# EAGLE board Centerboard - Prototype 2_WIP (EAGLE 7.2.0)
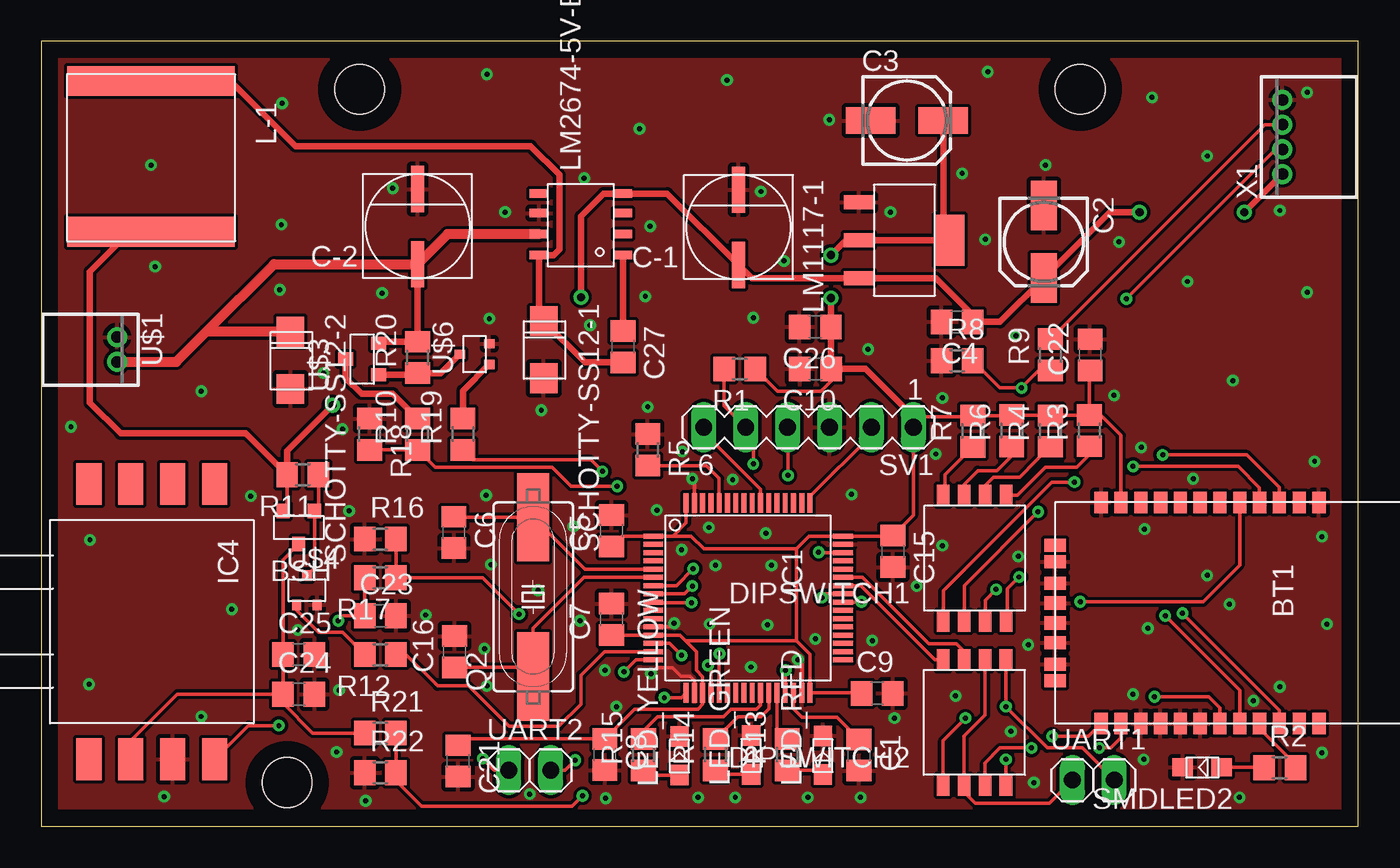
[diagram p0: board, top side]
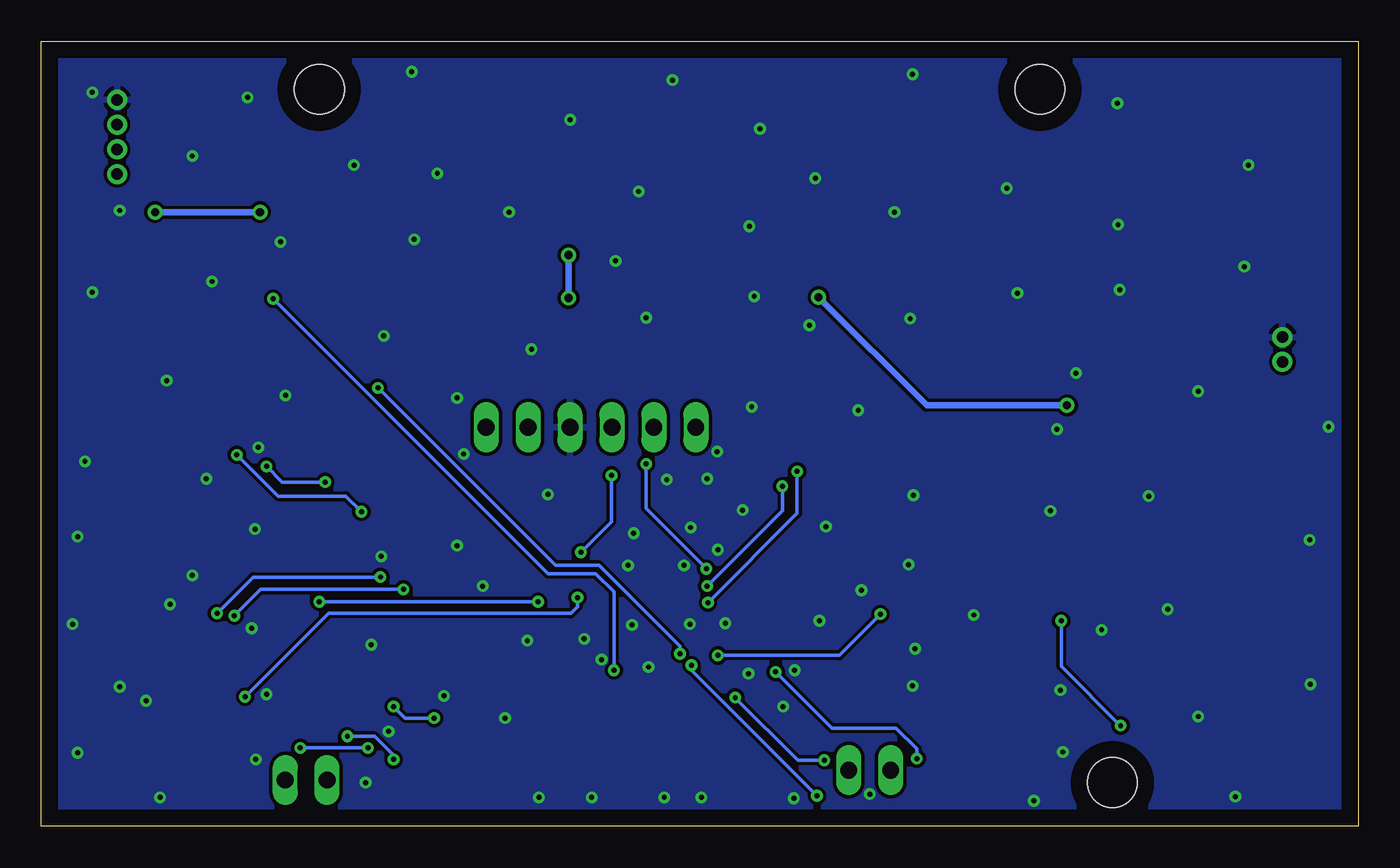
[diagram p1: board, bottom side, seen from below]

Size 79.8 x 47.55 mm. Coordinates in mm from the lower left corner, seen from the top.
Outline: 0,0 79.8,0 79.8,47.55 0,47.55 0,0
Copper layers (1*16): Top 0.035mm / dielectric 1.5mm / Bottom 0.035mm
Design rules "default *": minimum track width 0.2mm, minimum drill 0.3mm, track to track 0.2mm, track to pad 0.2mm, pad to pad 0.2mm, via to via 0.2mm, smd to smd 0mil, copper to edge 40mil, drill to drill 8mil, minimum pad ring 10mil, minimum via ring 8mil, stop-mask expansion 4mil, vias tented up to drill 0mil, thermal gap 10mil
Holes 3 mm at 19.3,44.65 14.9,2.65 62.95,44.65

## Footprints (pad centres in the part's own frame; a part is rotated, then mirrored left to right if it is on the bottom)
P-CHANNEL = smd 0.8 x 0.9: DRAIN 0,1; GATE -0.95,-1; SOURCE 0.95,-1
RN42 = smd 1.3 x 0.8: 1 -6.7,3.2; 2 -6.7,2; 3 -6.7,0.8; 4 -6.7,-0.4; 5 -6.7,-1.6; 6 -6.7,-2.8; 7 -6.7,-4; 8 -6.7,-5.2; 9 -6.7,-6.4; 10 -6.7,-7.6; 11 -6.7,-8.8; 12 -6.7,-10; 13 6.7,-10; 14 6.7,-8.8; 15 6.7,-7.6; 16 6.7,-6.4; 17 6.7,-5.2; 18 6.7,-4; 19 6.7,-2.8; 20 6.7,-1.6; 21 6.7,-0.4; 22 6.7,0.8; 23 6.7,2; 24 6.7,3.2 | smd 0.8 x 1.3: 28 3.1,-12.8; 29 -3.1,-12.8; 30 4.1,-12.8; 31 1.8,-12.8; 32 0.6,-12.8; 33 -0.6,-12.8; 34 -1.8,-12.8; 35 -4.1,-12.8
C0805 = smd 1.3 x 1.5: 1 -0.95,0; 2 0.95,0
153CLV-0505 = smd 3 x 1.6: + 2.2,0; - -2.2,0
CAP-6.3MM-DIA = smd 0.8 x 2.8: + 0,2.3; - 0,-2.25
DIPSWITCH4P = smd 0.76 x 1.27: B1 0,0; B2 1.27,0; B3 2.54,0; B4 3.81,0; T1 0,7.62; T2 1.27,7.62; T3 2.54,7.62; T4 3.81,7.62
LQFP64 = smd 0.3 x 1.2: 1 -3.75,-5.75; 2 -3.25,-5.75; 3 -2.75,-5.75; 4 -2.25,-5.75; 5 -1.75,-5.75; 6 -1.25,-5.75; 7 -0.75,-5.75; 8 -0.25,-5.75; 9 0.25,-5.75; 10 0.75,-5.75; 11 1.25,-5.75; 12 1.75,-5.75; 13 2.25,-5.75; 14 2.75,-5.75; 15 3.25,-5.75; 16 3.75,-5.75; 33 3.75,5.75; 34 3.25,5.75; 35 2.75,5.75; 36 2.25,5.75; 37 1.75,5.75; 38 1.25,5.75; 39 0.75,5.75; 40 0.25,5.75; 41 -0.25,5.75; 42 -0.75,5.75; 43 -1.25,5.75; 44 -1.75,5.75; 45 -2.25,5.75; 46 -2.75,5.75; 47 -3.25,5.75; 48 -3.75,5.75 | smd 1.2 x 0.3: 17 5.75,-3.75; 18 5.75,-3.25; 19 5.75,-2.75; 20 5.75,-2.25; 21 5.75,-1.75; 22 5.75,-1.25; 23 5.75,-0.75; 24 5.75,-0.25; 25 5.75,0.25; 26 5.75,0.75; 27 5.75,1.25; 28 5.75,1.75; 29 5.75,2.25; 30 5.75,2.75; 31 5.75,3.25; 32 5.75,3.75; 49 -5.75,3.75; 50 -5.75,3.25; 51 -5.75,2.75; 52 -5.75,2.25; 53 -5.75,1.75; 54 -5.75,1.25; 55 -5.75,0.75; 56 -5.75,0.25; 57 -5.75,-0.25; 58 -5.75,-0.75; 59 -5.75,-1.25; 60 -5.75,-1.75; 61 -5.75,-2.25; 62 -5.75,-2.75; 63 -5.75,-3.25; 64 -5.75,-3.75
CASE1351-01 = smd 2.54 x 1.52: GND 8.335,1.27; NC1 8.335,-3.81; NC2 -8.335,3.81; NC3 -8.335,1.27; NC4 -8.335,-1.27; NC5 -8.335,-3.81; VOUT 8.335,3.81; VS 8.335,-1.27
INDUCTOR = smd 1.8 x 10.16: 1 0,0; 2 9.14,0
SMD_LED_CUSTOM = smd 1.25 x 1.1: 1 0,0; 2 2.35,0
LM1117 = smd 0.84 x 1.8: ADJ/GND 0,0; INPUT 4.6,0; OUTPUT 2.3,0 | smd 3.1 x 1.8: OUTPUT2 2.3,5.5
LM2674 = smd 0.51 x 1.1: 1 0,0; 2 1.27,0; 3 2.54,0; 4 3.72,0; 5 3.72,5.1; 6 2.54,5.1; 7 1.27,5.1; 8 0,5.1
HC49UP = smd 5.334 x 1.93: 1 -4.826,0; 2 4.826,0
R0805 = smd 1.3 x 1.5: 1 -0.95,0; 2 0.95,0
SCHOTTY = smd 1.8 x 1.68: + 3.46,0; - 0,0
MA06-1 = drill 1.016 long: 1 -6.35,0; 2 -3.81,0; 3 -1.27,0; 4 1.27,0; 5 3.81,0; 6 6.35,0
JST-2WAYS = drill 0.7 pad 1.1: 1 -0.98,2.54; 2 0.52,2.54
SOT-323 = smd 0.559 x 0.648: DRAIN 0,0.895; GATE -0.623,-0.895; SOURCE 0.623,-0.895
1X02 = drill 1.016 long: 1 -1.27,0; 2 1.27,0
S4B-ZR = drill 0.7 pad 1.1: 1 -2.25,0; 2 -0.75,0; 3 0.75,0; 4 2.25,0

## Placement (x,y rotation side)
BSH  BSH201  [P-CHANNEL]  15.6,18.1 180 top
BT1  BLUETOOTH-RN42  [RN42]  74.22,12.92 270 top
C1  4u7  [C0805]  49.55,4.32 270 top
C2  10u  [153CLV-0505]  60.75,35.4 270 top
C3  10u  [153CLV-0505]  52.45,42.75 0 top
C4  100n  [C0805]  55.5,30.55 180 top
C5  100n  [C0805]  34.55,17.9 90 top
C6  25p  [C0805]  25,17.8 270 top
C7  100n  [C0805]  34.55,12.54 90 top
C8  100n  [C0805]  34.15,4.35 270 top
C9  100n  [C0805]  50.65,8.05 0 top
C10  100n  [C0805]  46.91,27.7 180 top
C15  100n  [C0805]  51.6,16.65 270 top
C16  25p  [C0805]  25.05,10.57 90 top
C21  1u  [C0805]  25.25,3.96 270 top
C22  100n  [C0805]  63.55,28.55 90 top
C23  470pF  [C0805]  20.55,12.75 0 top
C24  1uF  [C0805]  15.6,8 0 top
C25  0.01uF  [C0805]  15.6,10.4 0 top
C26  100n  [C0805]  46.9,30.25 180 top
C27  0.01uF  [C0805]  35.25,29.05 270 top
C-1  100uF  [CAP-6.3MM-DIA]  42.25,36.3 180 top
C-2  100uF  [CAP-6.3MM-DIA]  22.8,36.35 180 top
DIPSWITCH1  DIPSWITCH_4P  [DIPSWITCH4P]  58.47,20.05 180 top
DIPSWITCH2  DIPSWITCH_4P  [DIPSWITCH4P]  58.45,10.1 180 top
IC1  STM32F401RBT  [LQFP64]  42.83,13.83 270 top
IC4  MPXV7025DP  [CASE1351-01]  6.7,12.4 270 top
L-1  55uH  [INDUCTOR]  6.65,45.15 270 top
LED_GREEN  SMD_LED  [SMD_LED_CUSTOM]  43.02,3.15 90 top
LED_RED  SMD_LED  [SMD_LED_CUSTOM]  47.37,3.13 90 top
LED_YELLOW  SMD_LED  [SMD_LED_CUSTOM]  38.67,3.1 90 top
LM1117-1  LM1117  [LM1117]  49.55,37.8 270 top
LM2674-5V-BUCK1  LM2674-5VBUCK  [LM2674]  35.25,34.6 90 top
Q2  18p  [HC49UP]  29.81,13.9 90 top
R1  10k  [R0805]  42.32,27.7 180 top
R2  220  [R0805]  75.04,3.55 0 top
R3  1k  [R0805]  63.5,23.97 90 top
R4  1k  [R0805]  61.15,23.94 90 top
R5  10k  [R0805]  36.75,22.8 270 top
R6  1k  [R0805]  58.8,23.96 90 top
R7  1k  [R0805]  56.45,23.93 90 top
R8  1k  [R0805]  55.5,28.2 0 top
R9  680  [R0805]  61.15,28.56 90 top
R10  6.8k  [R0805]  22.8,23.75 90 top
R11  10k  [R0805]  15.85,21.3 180 top
R12  1k  [R0805]  20.55,10.4 180 top
R13  220  [R0805]  45.2,4.34 90 top
R14  220  [R0805]  40.85,4.34 90 top
R15  220  [R0805]  36.5,4.34 90 top
R16  1k  [R0805]  20.55,17.4 0 top
R17  680  [R0805]  20.55,15.05 180 top
R18  3.3k  [R0805]  19.9,23.75 270 top
R19  1k  [R0805]  25.55,23.75 90 top
R20  10k  [R0805]  22.8,28.4 90 top
R21  6k8  [R0805]  20.55,5.65 0 top
R22  10k  [R0805]  20.55,3.25 0 top
SCHOTTY-SS12-1  SCHOTTY-SS12  [SCHOTTY]  30.45,30.6 270 top
SCHOTTY-SS12-2  SCHOTTY-SS12  [SCHOTTY]  15.1,29.95 270 top
SMDLED2  SMD_LED  [SMD_LED_CUSTOM]  71.51,3.57 180 top
SV1  [MA06-1]  46.49,24.17 180 top
U$1  JST-2WAYS  [JST-2WAYS]  2.05,28.65 270 top
U$3  ZXMP10A13F  [P-CHANNEL]  19.45,28.3 90 top
U$4  SI1330EDL  [SOT-323]  16.1,14.3 0 top
U$6  SI1330EDL  [SOT-323]  26.25,28.6 90 top
UART1  [1X02]  63.75,2.8 0 top
UART2  [1X02]  29.6,3.4 0 top
X1  S4B-ZR  [S4B-ZR]  75.2,41.75 90 top

## Library data of the parts
BSH = BSH201
BT1 = RN42
C1-C10 C15 C16 C21-C27 R1 R5 R8-R12 R16-R22 = rcl
C-1 C-2 = panasonic-cap-100u
DIPSWITCH1 DIPSWITCH2 = dipswitch4p_updated
IC1 = E7020E
IC4 = MPXV7025
L-1 = inductor-55u
LED_GREEN LED_RED LED_YELLOW SMDLED2 = greenled_smd
LM1117-1 = LM1117-3v3_vreg
LM2674-5V-BUCK1 = LM2674-5v-buck
Q2 = crystal; OC_FARNELL: unknown; OC_NEWARK: unknown
R2-R4 R6 R7 R13-R15 = resistor
SCHOTTY-SS12-1 SCHOTTY-SS12-2 = schotty-SS12
SV1 = E7020E; OC_FARNELL: unknown; OC_NEWARK: unknown
U$1 = jst-2ways-zh
U$3 = ZXMP10A13F
U$4 U$6 = SI1330EDL
UART1 UART2 = pinhead
X1 = con-jst; MF: FARNELL; MPN: S4B-ZR(LF)(SN); OC_FARNELL: 9491830; OC_NEWARK: 38K8076

## Nets
+3V3: BT1.11 C3.+ C5.1 C7.1 C8.1 C9.1 C10.1 C15.1 C21.1 C22.1 C26.1 IC1.1 IC1.13 IC1.19 IC1.32 IC1.48 IC1.64 LM1117-1.OUTPUT LM1117-1.OUTPUT2 R1.1 R3.2 R4.2 R6.2 R7.2 SV1.1
+5V: BSH.SOURCE C2.+ C4.1 C-1.+ L-1.2 LM1117-1.INPUT LM2674-5V-BUCK1.4 R11.2 X1.1
BAT_MEAS: IC1.8 R10.1 R18.2
BATMEAS_TOGGLE: IC1.9 R19.1
BATSUP: C-2.+ LM2674-5V-BUCK1.7 R20.2 SCHOTTY-SS12-2.- U$1.2 U$3.SOURCE
BT1_CONNSTAT: BT1.19 IC1.41
BT1_GPIO3: BT1.20 DIPSWITCH1.T2
BT1_GPIO4: BT1.22 DIPSWITCH1.T1
BT1_GPIO6: BT1.3 DIPSWITCH1.T3
BT1_GPIO7: BT1.4 DIPSWITCH1.T4
BT1_RESET: BT1.5 IC1.40
BT1_USART1_RX: BT1.14 DIPSWITCH2.T2
BT1_USART1_TX: BT1.13 DIPSWITCH2.T1
GND: BT1.1 BT1.12 BT1.15 BT1.16 BT1.17 BT1.18 BT1.28 BT1.29 BT1.31 BT1.32 BT1.33 BT1.34 C1.2 C2.- C3.- C4.2 C5.2 C6.2 C7.2 C8.2 C9.2 C10.2 C15.2 C16.2 C21.2 C22.2 C23.2 C24.2 C25.2 C26.2 C-1.- C-2.- IC1.12 IC1.18 IC1.31 IC1.47 IC1.63 IC4.GND LED_GREEN.2 LED_RED.2 LED_YELLOW.2 LM1117-1.ADJ/GND LM2674-5V-BUCK1.6 R5.1 R8.1 R16.1 R18.1 R22.1 SCHOTTY-SS12-1.+ SCHOTTY-SS12-2.+ SMDLED2.2 SV1.3 U$1.1 U$4.SOURCE U$6.SOURCE X1.4
GPIO_ULTRA_INPUT: IC1.21 R8.2 R9.1
GPIO_ULTRA_TRIGGER: IC1.29 X1.2
LED_GREEN: IC1.27 R14.2
LED_RED: IC1.28 R13.2
LED_YELLOW: IC1.26 R15.2
N$1: C1.1 IC1.30
N$2: IC1.60 R5.2
N$3: LED_RED.1 R13.1
N$4: BT1.21 R2.2
N$5: DIPSWITCH1.B1 R3.1
N$6: DIPSWITCH1.B2 R4.1
N$7: DIPSWITCH1.B3 R6.1
N$8: C6.1 IC1.5 Q2.2
N$9: C16.1 IC1.6 Q2.1
N$10: DIPSWITCH1.B4 R7.1
N$11: R2.1 SMDLED2.1
N$12: R9.2 X1.3
N$13: C27.1 LM2674-5V-BUCK1.1
N$14: BSH.GATE R11.1 U$4.DRAIN
N$15: R12.2 U$4.GATE
N$16: LED_GREEN.1 R14.1
N$17: LED_YELLOW.1 R15.1
N$18: R10.2 U$3.DRAIN
N$19: R19.2 U$6.GATE
N$20: R20.1 U$3.GATE U$6.DRAIN
N$21: DIPSWITCH2.B2 DIPSWITCH2.T3 UART1.1
N$22: DIPSWITCH2.B1 DIPSWITCH2.T4 UART1.2
NRST: IC1.7 R1.2 SV1.5
PRES_VOLTAGE: IC1.20 R21.2 R22.2
PRESSURE_ADC: IC1.14 R16.2 R17.1
PRESSURE_ON/OFF: IC1.15 R12.1
SWCLK: IC1.49 SV1.2
SWDIO: IC1.46 SV1.4
SWO: IC1.55 SV1.6
USART1_RX: DIPSWITCH2.B3 IC1.43
USART1_TX: DIPSWITCH2.B4 IC1.42
USART2_RX: IC1.17 UART2.2
USART2_TX: IC1.16 UART2.1
V_PRESSURE: BSH.DRAIN C24.1 C25.1 IC4.VS R21.1
VOUT: C27.2 L-1.1 LM2674-5V-BUCK1.8 SCHOTTY-SS12-1.-
VOUT_PRESSURE: C23.1 IC4.VOUT R17.2

## Tracks (layer width: path | path; a pad name or v marks a point on that pad's centre or on a via)
+3V3  (via drill 0.5)
  Top 0.2: 38.28,17.58 IC1.1 35.18,17.58 C5.1 | 38.28,17.58 39.08,18.38 IC1.64 | 56.2,25.13 R7.2 | R7.2 58.77,24.88 R6.2 61.13,24.91 R4.2 63.47,24.89 | 63.47,24.89 R3.2 63.5,27.55 C22.1 | C9.1 49.67,8.08 IC1.32 46.58,10.42 45.75,11.25 | 45.75,11.25 39.03,11.25 | 45.75,11.25 45.75,16.8 | 45.75,16.8 46.53,17.58 IC1.48 51.58,17.58 C15.1 52.84,18.84 SV1.1 | C7.1 IC1.13 38.7,11.58 39.03,11.25 | 45.75,16.8 40.15,16.8 39.37,17.58 38.28,17.58 | 39.03,11.25 39.7,10.58 39.7,9.45 40.08,9.07 IC1.19 40.08,7.38 39.8,7.1 35.95,7.1 C8.1 25.6,5.3 25.6,5.26 C21.1 | 63.47,24.89 64.21,24.89 65.42,23.68 BT1.11 | 52.84,24.81 56.38,24.81 R7.2 | R1.1 44.62,26.35 47.25,26.35 47.86,26.96 C10.1
  Top 0.4: SV1.1 52.84,24.81 49.95,27.7 C10.1 C26.1 v47.85,32 | C3.+ 54.65,35.9 LM1117-1.OUTPUT2 LM1117-1.OUTPUT 48.75,35.5 v47.85,34.6
  Bottom 0.4: v47.85,34.6 v47.85,32
+5V  (via drill 0.5)
  Top 0.2: R11.2 14.9,19.35 14.65,19.35 BSH.SOURCE
  Top 0.4: L-1.2 5.35,36 2.95,33.6 2.95,25.65 4.8,23.8 12.4,23.8 R11.2 14.9,22.75 v17.65,25.5 | v32.7,32.05 32.7,36.95 34.07,38.32 LM2674-5V-BUCK1.4 37.93,38.32 C-1.+ 43.05,33.2 LM1117-1.INPUT 54.2,33.2 56.45,30.95 C4.1 58.1,30.55 C2.+ 64.75,37.2 v66.55,37.2 | X1.1 v72.9,37.2
  Bottom 0.4: v17.65,25.5 26.15,25.5 v32.7,32.05 | v72.9,37.2 v66.55,37.2
BAT_MEAS  (via drill 0.3)
  Top 0.2: v34.9,20.6 v34.9,20.61 32.09,20.61 30.95,21.75 23.85,21.75 R10.1 R18.2 | v39.45,14.55 38.98,14.08 IC1.8
  Bottom 0.2: v34.9,20.6 34.9,19.1 v39.45,14.55
BATMEAS_TOGGLE  (via drill 0.3)
  Top 0.2: v34,21.5 33.3,22.2 26.15,22.2 R19.1 | v39.4,13.55 37.11,13.55 IC1.9
  Bottom 0.2: v34,21.5 34,18.95 v39.4,13.55
BATSUP
  Top 0.4: C-2.+ R20.2 20.55,29.35 U$3.SOURCE
  Top 0.6: LM2674-5V-BUCK1.7 24.62,35.87 C-2.+ 14.1,34.05 10,29.95 | U$1.2 8.18,28.13 9.25,29.2 10,29.95 | SCHOTTY-SS12-2.- 10,29.95
BT1_CONNSTAT  (via drill 0.3)
  Top 0.2: IC1.41 47.53,14.08 v47.3,13.85 | v67.45,7.85 70.75,7.85 71.42,7.18 BT1.19
  Bottom 0.2: v47.3,13.85 47.3,13.3 47.7,12.9 62.4,12.9 v67.45,7.85
BT1_GPIO3  (via drill 0.3)
  Top 0.2: BT1.20 72.62,8.23 v68.1,12.75 | v57.85,14.35 57.2,13.7 DIPSWITCH1.T2
  Bottom 0.2: v68.1,12.75 66.5,14.35 v57.85,14.35
BT1_GPIO4  (via drill 0.3)
  Top 0.2: BT1.22 75.02,7.03 v69.15,12.9 | v59.25,15.1 58.55,14.4 58.55,12.51 DIPSWITCH1.T1
  Bottom 0.2: v69.15,12.9 66.95,15.1 v59.25,15.1
BT1_GPIO6  (via drill 0.3)
  Top 0.2: BT1.3 75.02,20.53 73.05,22.5 v67.95,22.5 | v60.4,19.05 55.93,14.58 DIPSWITCH1.T3
  Bottom 0.2: v67.95,22.5 65.45,20 61.35,20 v60.4,19.05
BT1_GPIO7  (via drill 0.3)
  Top 0.2: v66.15,21.8 72.54,21.8 73.82,20.52 BT1.4 | v62.6,20.85 61.25,20.85 54.66,14.26 DIPSWITCH1.T4
  Bottom 0.2: v66.15,21.8 65.2,20.85 v62.6,20.85
BT1_RESET  (via drill 0.3)
  Top 0.2: IC1.40 49.68,13.58 v49.7,13.6 | v62.95,13.6 70.4,13.6 72.62,15.82 BT1.5
  Bottom 0.2: v49.7,13.6 v62.95,13.6
BT1_USART1_RX  (via drill 0.3)
  Top 0.2: DIPSWITCH2.T2 57.18,3.83 58.1,4.75 v60,4.75 | v64.1,4.75 64.8,4.75 65.42,5.37 BT1.14
  Bottom 0.2: v60,4.75 v64.1,4.75
BT1_USART1_TX  (via drill 0.3)
  Top 0.2: DIPSWITCH2.T1 v58.45,4.05 | v61.25,5.45 63.45,5.45 BT1.13
  Bottom 0.2: v58.45,4.05 58.45,4.3 59.6,5.45 v61.25,5.45
GND  (via drill 0.3)
  Top 0.2: IC1.12 38.13,12.08 v38.35,12.3 | IC1.63 39.58,20.92 v39.45,21.05 | IC1.31 46.08,9.87 v45.85,10.1 | IC1.18 39.58,8.82 39.3,9.1 38.75,9.1 38.25,9.6 37.3,9.6 v36.95,9.25
  other vias: 54.2,22.55 59.2,16.35 66.65,22.95 70.65,40.6 76.7,32.35 69.45,33 72.2,27 66.85,18 77.6,17.55 67.05,12 40.5,12.25 40.45,18.1 43.9,17.75 46.9,11.35 43,9.65 44,12.2 37.3,19.15 32.65,12.45 30.1,14.3 27.25,15.85 26.95,20.05 32.25,18.15 39.8,1.75 42.05,1.75 49.65,1.75 46.45,1.75 51.7,6.55 50.35,11.25 60.15,2.65 59.8,11 66.15,8 66.8,4.05 77.6,4.45 75.05,8.45 70.65,15.2 72,13.45 77.15,22.1 49.1,20.1 26.85,10.75 27,8.5 76.7,44.45 75.05,37.3 41.9,21 38.85,22.7 38.8,16.75 54.6,17 44.25,15.8 40.85,15.8 53.05,14.55 58.75,5.75 15.55,11.9 18.05,8.25 55.4,7.9 69.8,21.05 77.9,12.25 34.85,7.25 34.15,9.45 73.45,7.6 72.6,1.75 57.2,35.55 60.85,40.05 47.75,42.8 43.6,38.45 41.55,45.2 67.3,44.15 57.35,45.7 65.3,35.4 43.15,30.8 33.25,30.35 30.3,25.2 36.75,25.4 36.9,36.35 28.1,37.2 21.3,38.65 6.65,40.05 9.7,26.35 1.8,24.2 2.95,17.35 11.55,13.15 9.7,6.65 7.45,1.8 17.9,4.5 19.65,1.55 23.3,12.8 18.65,19.1 18.25,24.05 17.1,27.45 20.65,32.3 27.15,30.75 34.2,1.7 14.55,36.45 14.6,43.8 32.9,39.25 50.1,28.9 59.05,29.7 54.6,25.95 36.25,42.25 27,45.55 6.9,33.9 14.45,32.5 36.6,32.1 45,34.25 51.45,37.2 55.8,39.55 2.9,8.6 12.7,20 29.6,1.95 65,26.1
  pour Top: 0,80 100,80 100,0 0,0
  pour Bottom: 0,80 100,80 100,0 0,0
GPIO_ULTRA_INPUT  (via drill 0.3)
  Top 0.2: v41.1,10.45 41.08,10.43 IC1.21 | R9.1 60.46,27.61 v59.4,26.55 58.1,26.55 R8.2
  Bottom 0.2: v41.1,10.45 41.1,10.9 46,15.8 48.65,15.8 v59.4,26.55
GPIO_ULTRA_TRIGGER  (via drill 0.3)
  Top 0.2: IC1.29 45.1,8.1 v45.1,9.45 | v65.75,31.95 74.8,41 X1.2
  Bottom 0.2: v45.1,9.45 45.1,14.2 46.2,15.3 49.1,15.3 v65.75,31.95
LED_GREEN
  Top 0.2: IC1.27 44.08,7.13 43.6,6.65 42.21,6.65 R14.2
LED_RED
  Top 0.2: IC1.28 44.58,5.91 R13.2
LED_YELLOW
  Top 0.2: IC1.26 43.58,7.33 43.35,7.1 41.8,7.1 41.35,6.65 37.35,6.65 36.5,5.8 R15.2
N$1
  Top 0.2: IC1.30 45.58,7.12 46.1,6.6 48.22,6.6 C1.1
N$2
  Top 0.2: IC1.60 41.08,21.07 40.3,21.85 R5.2
N$3
  Top 0.2: R13.1 47.11,3.39 LED_RED.1
N$4
  Top 0.2: BT1.21 74.05,5.99 74.05,5.7 75.99,3.76 R2.2
N$5
  Top 0.2: DIPSWITCH1.B1 59.15,20.05 60.85,21.75 62.75,21.75 63.5,22.5 R3.1
N$6
  Top 0.2: DIPSWITCH1.B2 57.2,20.65 57.7,21.15 59.3,21.15 60.25,22.1 R4.1
N$7
  Top 0.2: DIPSWITCH1.B3 55.93,20.73 56.75,21.55 57.9,21.55 58.8,22.45 R6.1
N$8
  Top 0.2: IC1.5 32.96,15.58 Q2.2 25.02,18.73 C6.1
N$9
  Top 0.2: 29.51,9.37 Q2.1 | IC1.6 32.88,15.08 29.81,12.01 Q2.1 | C16.1 29.81,9.62 Q2.1
N$10
  Top 0.2: DIPSWITCH1.B4 54.75,20.14 54.75,21.28 R7.1
N$11
  Top 0.2: R2.1 74.32,3.57 SMDLED2.1
N$12
  Top 0.2: R9.2 74.14,42.5 X1.3
N$13
  Top 0.4: LM2674-5V-BUCK1.1 C27.1
N$14
  Top 0.2: U$4.DRAIN 16.55,15.65 BSH.GATE 16.55,19.35 16.8,19.35 R11.1
N$15
  Top 0.2: R12.2 18.25,11.75 16.8,11.75 15.48,13.07 U$4.GATE
N$16
  Top 0.2: LED_GREEN.1 41.09,3.15 R14.1
N$17
  Top 0.2: R15.1 36.79,3.1 LED_YELLOW.1
N$18
  Top 0.4: R10.2 21.3,26.2 19.4,26.2 18.45,27.15 U$3.DRAIN
N$19
  Top 0.4: R19.2 25.55,26.38 U$6.GATE
N$20
  Top 0.4: U$3.GATE 22.7,27.35 R20.1 24.2,27.45 U$6.DRAIN
N$21
  Top 0.2: UART1.1 61.08,1.4 56.6,1.4 55.95,2.05 55.95,2.44 DIPSWITCH2.T3 55.91,5.46 57.18,6.73 DIPSWITCH2.B2
N$22  (via drill 0.3)
  Top 0.2: DIPSWITCH2.T4 54.64,5.19 v56,6.55 | DIPSWITCH2.B1 v58.45,7.25 60.95,4.75 63.07,4.75 UART1.2
  Bottom 0.2: v56,6.55 57.75,6.55 v58.45,7.25
NRST  (via drill 0.3)
  Top 0.2: IC1.7 38.48,14.58 v39.5,15.6 | v43.15,21.95 43.15,23.7 SV1.5 41.37,25.48 R1.2
  Bottom 0.2: v39.5,15.6 43.15,19.25 v43.15,21.95
PRES_VOLTAGE  (via drill 0.3)
  Top 0.2: R21.2 R22.2 21.5,2.75 23.05,1.2 32.15,1.2 v32.8,1.85 | IC1.20 40.58,9.57 v40.4,9.75
  Bottom 0.2: v40.4,9.75 40.4,9.45 v32.8,1.85
PRESSURE_ADC  (via drill 0.3)
  Top 0.2: v38.8,10.35 38.07,11.08 IC1.14 | R16.2 R17.1 26.75,15.05 v28.95,12.85
  Bottom 0.2: v28.95,12.85 31.45,10.35 v38.8,10.35
PRESSURE_ON/OFF
  Top 0.2: IC1.15 34.13,10.58 32.7,9.15 32.7,7.4 31.35,6.05 28.35,6.05 25.9,8.5 24,8.5 22.1,10.4 R12.1
SWCLK
  Top 0.2: IC1.49 46.58,19.98 50.3,23.7 SV1.2
SWDIO  (via drill 0.3)
  Top 0.2: IC1.46 47.12,16.58 v47.1,16.6 | v45.25,21.25 45.25,24.14 SV1.4
  Bottom 0.2: v47.1,16.6 45.25,18.45 v45.25,21.25
SWO
  Top 0.2: IC1.55 43.58,20.42 40.14,23.86 SV1.6
USART1_RX
  Top 0.2: IC1.43 49.77,15.08 53.8,11.05 55.45,11.05 55.91,10.59 DIPSWITCH2.B3
USART1_TX
  Top 0.2: IC1.42 49.67,14.58 54.15,10.1 DIPSWITCH2.B4
USART2_RX  (via drill 0.3)
  Top 0.2: UART2.2 31.75,3.4 v32.35,4 | v37.75,7.8 38.8,7.8 IC1.17
  Bottom 0.2: v32.35,4 33.95,4 v37.75,7.8
USART2_TX  (via drill 0.3)
  Top 0.2: UART2.1 27.45,3.4 v26.75,4.1 | v35.3,9.35 36.03,10.08 IC1.16
  Bottom 0.2: v26.75,4.1 26.75,4.7 28,5.95 31.9,5.95 v35.3,9.35
V_PRESSURE
  Top 0.2: C24.1 C25.1 14.65,16.15 BSH.DRAIN | C24.1 8.25,8 5.43,5.18 IC4.VS | C24.1 14.65,7.45 16.45,5.65 R21.1
VOUT
  Top 0.4: C27.2 32.95,28.1 SCHOTTY-SS12-1.- 30.15,30.9 LM2674-5V-BUCK1.8 31.05,34.6 31.4,34.95 31.4,39.45 29.65,41.2 15.4,41.2 11.45,45.15 L-1.1
VOUT_PRESSURE  (via drill 0.3)
  Top 0.2: R17.2 C23.1 18.3,12.75 v18,12.45 | IC4.VOUT 12.54,6.1 v14.4,6.1
  Bottom 0.2: v14.4,6.1 18,9.7 v18,12.45